# Altium PCB AP2-H.PcbDoc (part 3 of 4)
Units mm, origin at the board's own origin, x right, y up, seen from the top; angles counter-clockwise.
Board outline 380 x 190 mm, 2 copper layers (Top Layer, Bottom Layer); 519 components, 519 nets, 1666 pads, 438 vias.
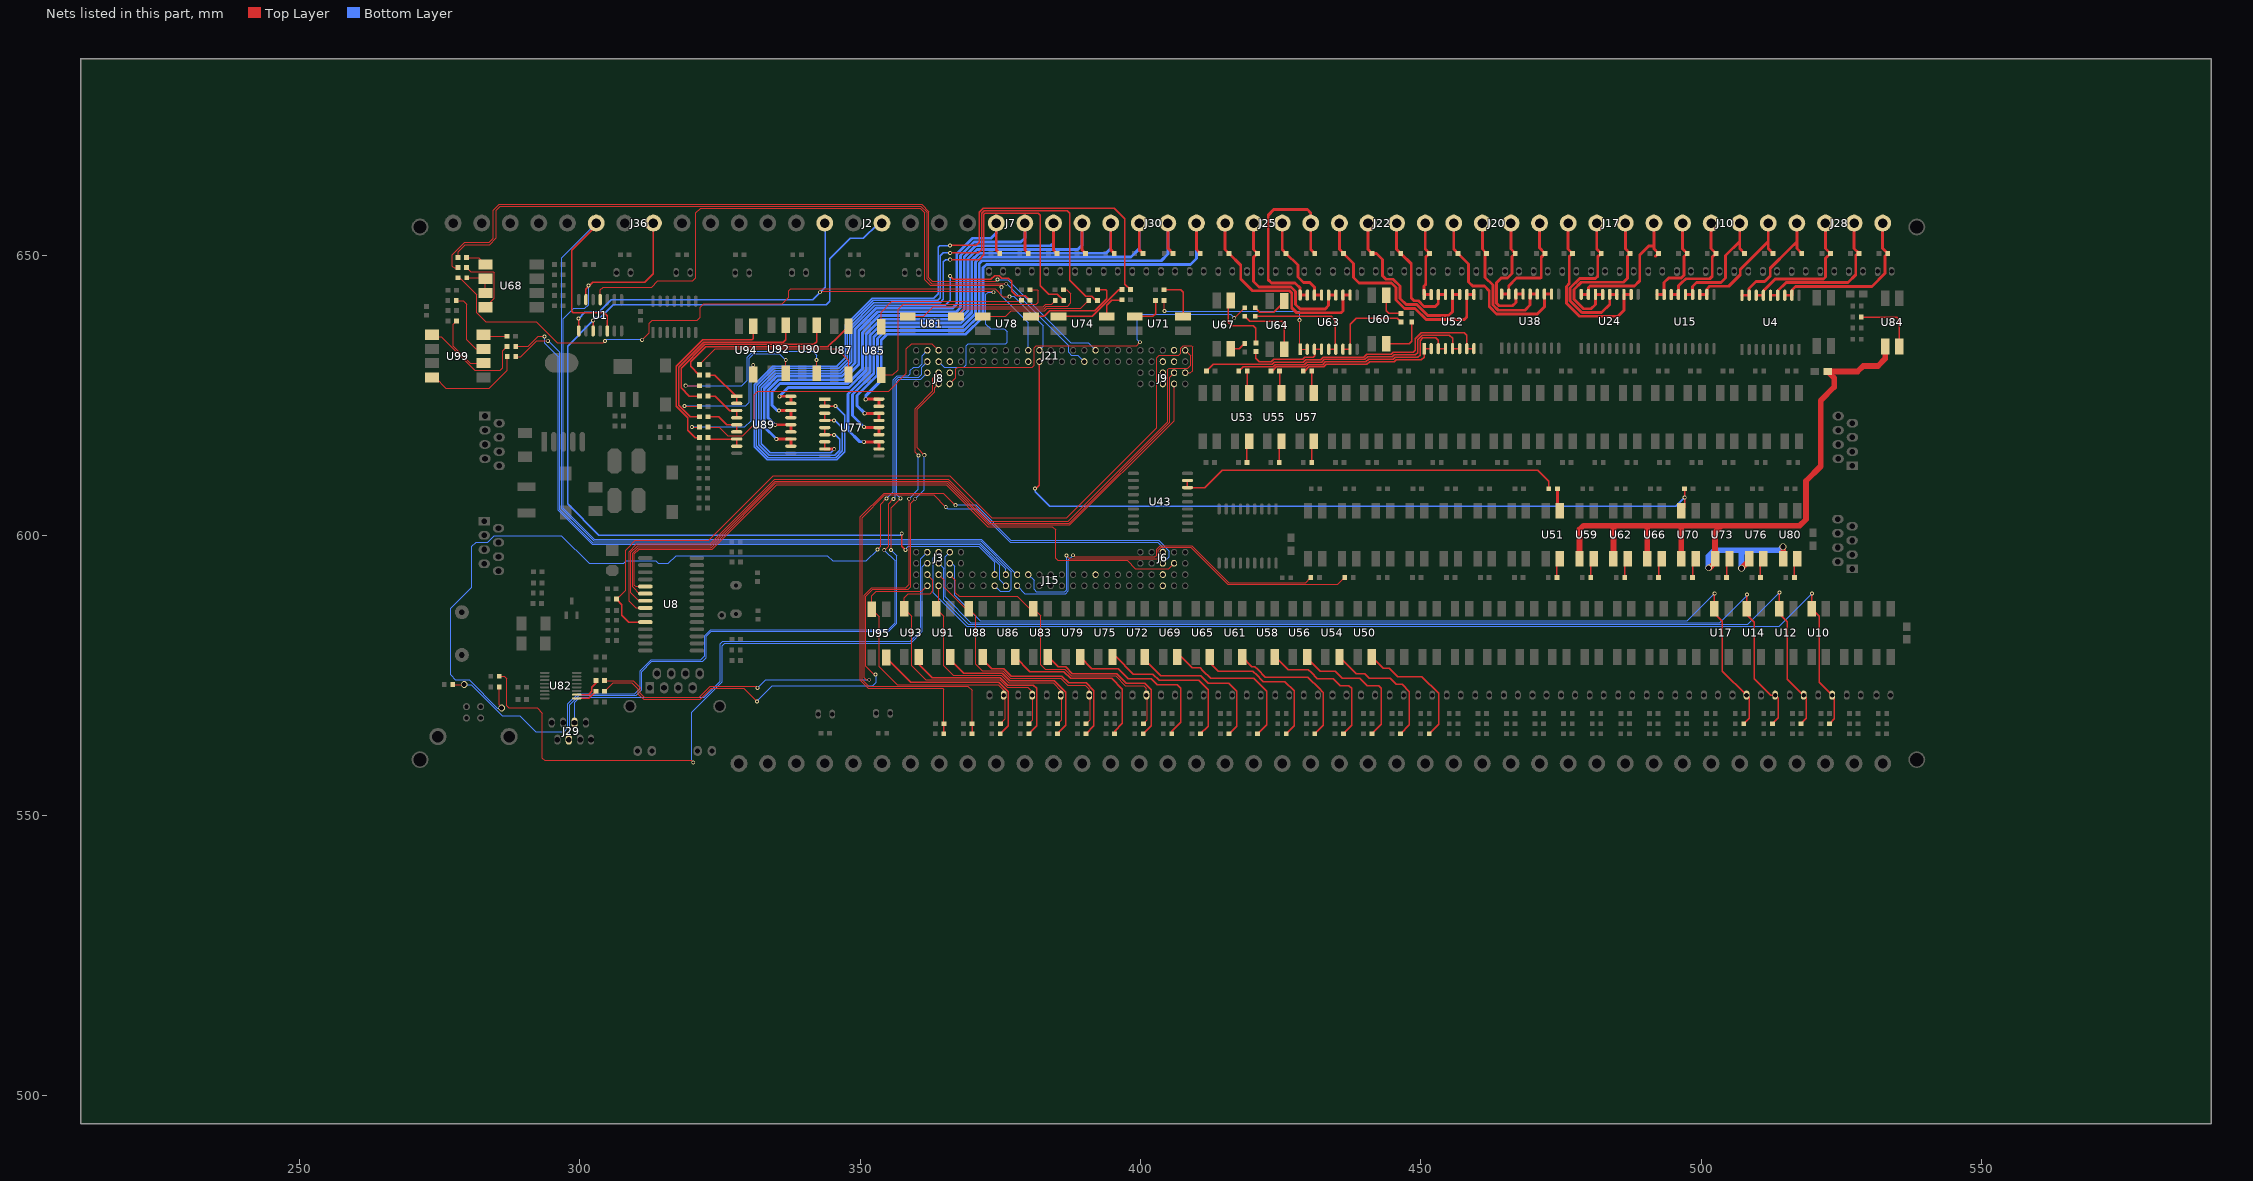
[diagram p3: the nets of this part, all layers, seen from the top]

## Via types
v1: diameter 0.7, hole 0.4, Top Layer to Bottom Layer, 204 vias
v2: diameter 1.2, hole 0.9, Top Layer to Bottom Layer, 160 vias
v3: diameter 1, hole 0.7, Top Layer to Bottom Layer, 38 vias
v4: diameter 0.8, hole 0.5, Top Layer to Bottom Layer, 14 vias
v5: diameter 3.556, hole 3.556, Top Layer to Bottom Layer, 10 vias
v6: diameter 2.3, hole 1.7, Top Layer to Bottom Layer, 8 vias
v7: diameter 1.1, hole 0.8, Top Layer to Bottom Layer, 2 vias
v8: diameter 2.8, hole 2.8, Top Layer to Bottom Layer, 2 vias

## Nets (pads, with @x,y where several pads share a name; then routed paths per layer and width w, separated by ;. In a path a pad name is that pad's centre, name@x,y a point inside that pad or via, vN(x,y) a via of type N, cw(c..) or ccw(c..) an arc to the next point about the centre after c; other vN are vias at no path point) (continued)
NetR127_2: R127.2 U52.7 U52.8 | length 54.3
  Top Layer w0.254: R127.2@411.776,629.3 413.008,630.532 423.532,630.532 423.9,630.9 429.047,630.9 429.479,631.332 432.132,631.332 432.6,631.8 439.857,631.8 440.353,632.295 444.774,632.295 445.106,632.627 448.664,632.627 449.036,633 449.036,635.058 450.11,636.132 457.768,636.132 458.22,635.68 U52.7@458.22,633.3 U52.8@459.49,633.3
NetR128_1: R128.1 U50.2 | length 23
  Top Layer w0.254: U50.2@441.298,578.3 443.279,576.319 444.36,576.319 ; 444.1,576.319 444.36,576.319 ; 450,574.782 450.224,574.782 ; R128.1@451.512,564.6 453.2,566.288 453.2,571.807 450.224,574.782 ; 444.36,576.319 445.897,574.782 450.224,574.782
NetR130_2: R130.2 U51.2 | length 3.5
  Top Layer w0.254: R130.2@474.286,592.5 474.286,595.273 U51.2@474.813,595.8
NetR131_1: R131.1 U51.3 | length 4.1
  Top Layer w0.508: R131.1@474.373,608.3 474.373,604.84 U51.3@474.813,604.4
NetR131_2: R131.2 U43.7 U43.8 | length 69.2
  Top Layer w0.254: U43.8@408.4,609.79 U43.7@408.4,608.52 411.52,608.52 414.62,611.62 470.88,611.62 472.849,609.651 R131.2@472.849,608.3
NetR132_2: R132.2 U53.2 | length 4
  Top Layer w0.254: R132.2@419.003,613 419.003,616.395 U53.2@419.408,616.8
NetR133_1: R133.1 U53.3 | length 3.5
  Top Layer w0.254: U53.3@419.058,625.751 R133.1@419.058,629.3
NetR133_2: R133.2 U52.5 U52.6 | length 45.5
  Top Layer w0.254: R133.2@417.534,629.3 418.334,630.1 423.71,630.1 424.079,630.468 429.226,630.468 429.658,630.9 432.311,630.9 432.779,631.368 440.036,631.368 440.532,631.864 444.953,631.864 445.285,632.196 449.064,632.196 449.468,632.6 449.468,634.879 450.289,635.7 455.1,635.7 455.68,635.12 U52.5@455.68,633.3 U52.6@456.95,633.3
NetR134_1: R134.1 U54.2 | length 23.2
  Top Layer w0.254: U54.2@435.514,578.3 438.495,575.319 440.006,575.319 440.819,574.506 444.523,574.506 445.63,573.4 446.7,573.4 448,572.1 448,566.189 R134.1@446.411,564.6
NetR140_2: R140.2 U55.2 | length 4
  Top Layer w0.254: R140.2@424.782,613 424.782,616.405 U55.2@425.177,616.8
NetR141_1: R141.1 U55.3 | length 3.5
  Top Layer w0.254: U55.3@424.816,625.761 R141.1@424.816,629.3
NetR141_2: R141.2 U52.3 U52.4 | length 36.7
  Top Layer w0.254: R141.2@423.292,629.3 423.521,629.3 424.258,630.037 429.405,630.037 429.837,630.468 432.49,630.468 432.958,630.936 440.215,630.936 440.71,631.432 445.132,631.432 445.464,631.764 449.5,631.764 449.9,632.164 449.9,634.7 450.4,635.2 452.7,635.2 453.14,634.76 U52.3@453.14,633.3 U52.4@454.41,633.3
NetR142_1: R142.1 U56.2 | length 24.2
  Top Layer w0.254: U56.2@429.73,578.3 U56.2@429.824,578.3 ; U56.2@429.824,577.8 430.001,577.8 432.087,575.714 434.771,575.714 435.271,575.214 435.979,574.506 439.169,574.506 439.669,574.006 440.482,573.194 442.5,573.194 443,572.694 443,566.29 R142.1@441.31,564.6
NetR144_1: R144.1 U59.1 U62.1 U66.1 U70.1 U73.1 U76.1 U80.1 U84.1 | length 139.2
  Top Layer w0.254: 502.166,599 502.5,598.666 ; U73.1@502.5,596.468 502.5,595.84 U73.1@502.54,595.8
  Top Layer w1.016: U59.1@478.327,595.8 478.327,601.034 479.026,601.734 503.69,601.734 ; U62.1@484.38,595.8 484.38,601.732 ; U66.1@490.433,595.8 490.433,601.515 ; U70.1@496.487,595.8 496.487,601.676 ; v2@501.472,594.106 502.5,595.134 U73.1@502.5,595.84 ; U73.1@502.5,596.468 502.5,598.666 502.5,600.544 503.69,601.734 ; v2(507.213,594.131) 508.593,595.512 U76.1@508.593,595.8 ; v2(514.604,597.967) 514.647,597.924 U80.1@514.647,595.8 ; U84.1@532.841,633.684 532.841,631.495 531.553,630.207 528.931,630.207 527.932,629.209 R144.1@522.605,629.209 523.748,628.066 523.748,626.44 521.353,624.045 521.353,612.31 518.732,609.689 518.732,602.85 517.615,601.734 503.69,601.734
  Bottom Layer w1.016: v2@501.345,594.208 501.345,596.29 502.412,597.357 507.898,597.357 ; v2(507.213,594.131) 507.213,596.671 507.898,597.357 ; v2(514.604,597.967) 513.994,597.357 507.898,597.357
  other v2: 501.371,594.208
NetR145_2: R145.2 U57.2 | length 4
  Top Layer w0.254: R145.2@430.561,613 430.561,616.416 U57.2@430.945,616.8
NetR146_1: R146.1 U57.3 | length 3.5
  Top Layer w0.254: U57.3@430.574,625.772 R146.1@430.574,629.3
NetR146_2: R146.2 U52.1 U52.2 | length 25.4
  Top Layer w0.254: R146.2@429.05,629.3 429.279,629.3 430.016,630.037 432.669,630.037 433.137,630.505 440.394,630.505 440.889,631 445.311,631 445.643,631.332 448.942,631.332 450.132,631.332 450.6,631.8 U52.1@450.6,633.3 U52.2@451.87,633.3
NetR147_1: R147.1 U58.2 | length 24.6
  Top Layer w0.254: U58.2@423.946,578.3 U58.2@424.609,578.3 ; U58.2@424.609,577.8 426.371,576.038 429.936,576.038 430.436,575.538 431.573,574.401 434.399,574.401 434.4,574.4 434.436,574.4 435.642,573.194 437.206,573.194 437.7,572.7 437.7,566.091 R147.1@436.209,564.6
NetR148_1: R148.1 U59.2 | length 2.8
  Top Layer w0.254: R148.1@480.338,592.5 U59.2@480.338,595.271
NetR157_2: R157.2 U60.2 | length 8.2
  Top Layer w0.254: U60.2@443.84,634.2 448,634.2 448.4,634.6 R157.2@448.4,638.076
NetR158_1: R158.1 U60.3 | length 5.6
  Top Layer w0.254: U60.3@443.84,642.8 443.84,640.06 444.3,639.6 R158.1@446.5,639.6
NetR158_2: R158.2 U63.7 U63.8 | length 15.6
  Top Layer w0.254: U63.7@436.12,633.2 U63.8@437.39,633.2 437.39,637.69 438.459,638.759 445.817,638.759 R158.2@446.5,638.076
NetR159_1: R159.1 U61.2 | length 25.1
  Top Layer w0.254: U61.2@418.163,578.3 419.867,576.595 420.405,576.595 420.905,576.095 422.274,574.726 429.874,574.726 431.995,572.605 432.001,572.605 432.477,572.129 432.477,572.123 432.6,572 432.6,566.092 R159.1@431.108,564.6
NetR160_1: R160.1 U62.2 | length 3.5
  Top Layer w0.254: R160.1@486.39,592.5 486.39,595.27 U62.2@486.92,595.8
NetR163_2: R163.2 U64.2 | length 12
  Top Layer w0.254: R163.2@418.6,639.076 419.476,638.2 425.3,638.2 425.64,637.86 U64.2@425.64,633.4
NetR164_1: R164.1 U64.3 | length 6.6
  Top Layer w0.254: R164.1@420.5,640.6 421.3,639.8 423.8,639.8 425.64,641.64 U64.3@425.64,642
NetR164_2: R164.2 U63.5 U63.6 | length 21
  Top Layer w0.254: R164.2@420.5,639.076 434.024,639.076 434.8,638.3 434.8,633.25 U63.6@434.85,633.2 U63.5@433.58,633.2
NetR165_1: R165.1 U65.2 | length 25.8
  Top Layer w0.254: U65.2@412.379,577.3 413.896,575.782 420.054,575.782 420.828,575.009 ; 420.554,575.282 421.924,573.913 425.787,573.913 427.406,572.294 427.406,565.999 R165.1@426.008,564.6
NetR166_1: R166.1 U66.2 | length 3.5
  Top Layer w0.254: R166.1@492.441,592.5 492.441,595.268 U66.2@492.973,595.8
NetR171_2: R171.2 U67.2 | length 2.8
  Top Layer w0.254: U67.2@416.14,633.3 417.676,633.3 R171.2@418.6,634.224
NetR172_1: R172.1 U67.3 | length 12.1
  Top Layer w0.254: U67.3@416.14,641.9 415.646,641.406 415.646,638.048 416.294,637.4 420.1,637.4 420.6,636.9 R172.1@420.6,634.3
NetR172_2: R172.2 U63.3 U63.4 | length 14.8
  Top Layer w0.254: R172.2@420.6,632.776 420.6,631.564 421.2,630.964 423.353,630.964 423.789,631.4 428.936,631.4 429.3,631.764 430.8,631.764 431.1,632.064 431.1,633.14 U63.3@431.04,633.2 U63.4@432.31,633.2
NetR177_1: R177.1 U69.2 | length 26.7
  Top Layer w0.254: U69.2@406.595,578.3 407.258,578.3 409.213,576.345 410.655,576.345 411.155,575.845 412.53,574.47 420.218,574.47 422.506,572.181 422.506,566.199 R177.1@420.907,564.6
NetR178_1: R178.1 U70.2 | length 3.5
  Top Layer w0.254: R178.1@498.493,592.5 498.493,595.266 U70.2@499.027,595.8
NetR179_2: R179.2 U68.1 | length 3.9
  Top Layer w0.16: R179.2@279.806,649.554 281.94,649.554 U68.1@283.185,648.31
NetR183_2: R183.2 U68.2 U68.3 | length 6
  Top Layer w0.16: R183.2@279.832,645.947 283.007,645.947 U68.2@283.185,645.77 U68.3@283.185,643.23
  Top Layer w0.203: U68.3@282.542,643.21 U68.3@282.562,643.23
NetR185_2: R185.2 U68.4 | length 12.9
  Top Layer w0.16: R185.2@279.806,647.751 280.543,647.014 284.556,647.014 284.759,646.811 284.759,642.264 U68.4@283.185,640.69
  Top Layer w0.203: U68.4@282.042,641.21 U68.4@282.562,640.69
NetR186_2: R186.2 U71.2 | length 7.9
  Top Layer w0.254: R186.2@404.224,643.8 407.2,643.8 407.6,643.4 U71.2@407.6,639.04
NetR187_1: R187.1 U71.3 | length 6.3
  Top Layer w0.254: U71.3@399,639.04 402.24,639.04 402.7,639.5 R187.1@402.7,641.9
NetR187_2: R187.2 U63.1 U63.2 | length 33.8
  Top Layer w0.16: v1(404.292,640.004) R187.2@404.292,641.832 ; U63.1@428.396,633.304 v1(428.396,638.378) ; U63.1@428.5,633.2 U63.2@429.77,633.2
  Bottom Layer w0.16: v1(404.292,640.004) 428.219,640.004 428.396,639.826 v1(428.396,638.378)
NetR188_1: R188.1 U72.2 | length 26.9
  Top Layer w0.254: U72.2@400.811,577.8 403.675,574.936 410.788,574.936 412.118,573.606 415.762,573.606 417.187,572.181 417.187,565.981 R188.1@415.806,564.6
NetR189_1: R189.1 U73.2 | length 3.5
  Top Layer w0.254: R189.1@504.545,592.5 504.545,595.265 U73.2@505.08,595.8
NetR192_2: R192.2 U74.2 | length 5.2
  Top Layer w0.254: U74.2@394,639.04 394,641.036 394.864,641.9 396.722,641.9 R192.2@396.722,641.762
NetR193_1: R193.1 U74.3 | length 13.3
  Top Layer w0.254: U74.3@385.4,639.04 391.419,639.04 396.179,643.8 R193.1@396.725,643.8
NetR193_2: R193.2 U77.1 U77.2 | length 145.3
  Top Layer w0.254: U77.1@343.7,624.3 U77.2@343.7,623.03 v1@345.618,623.03 ; v1@365.989,651.764 370.764,651.764 371.264,652.264 371.264,657.601 371.98,658.317 395.351,658.317 397.231,656.438 397.231,644.818 R193.2@398.249,643.8
  Bottom Layer w0.254: v1(345.618,623.062) 347.287,621.393 347.287,615.841 347.276,615.831 347.276,614.876 345.863,613.463 333.47,613.463 331.092,615.842 331.092,626.841 334.445,630.194 345.846,630.194 347.312,631.66 347.312,637.498 352.137,642.323 363.118,642.323 363.916,643.12 363.916,651.419 364.185,651.688 v1(366.039,651.688)
NetR194_1: R194.1 U75.2 | length 27.9
  Top Layer w0.254: U75.2@395.027,578.3 395.69,578.3 398.764,575.226 402.236,575.226 403.338,574.123 410.451,574.123 412.09,572.485 412.09,565.985 R194.1@410.705,564.6
NetR195_1: R195.1 U76.2 | length 3.5
  Top Layer w0.254: R195.1@510.597,592.5 510.597,595.263 U76.2@511.133,595.8
NetR198_2: R198.2 U78.2 | length 17.5
  Top Layer w0.254: U78.2@380.9,639.1 382.879,639.1 383.874,640.095 391.888,640.095 394,642.207 394,643.6 393.8,643.8 R198.2@392.324,643.8
NetR199_1: R199.1 U78.3 | length 20.1
  Top Layer w0.203: U78.3@371.9,639.04 375.94,639.04 376.969,640.069 382.969,640.069 383.401,640.501 389.401,640.501 R199.1@390.8,641.9
NetR199_2: R199.2 U77.3 U77.4 | length 135.4
  Top Layer w0.254: U77.3@343.7,621.76 U77.4@343.7,620.49 v1@345.345,620.49 ; v1@366.141,650.367 371.094,650.367 371.678,650.951 371.678,657.429 372.152,657.903 386.944,657.903 387.426,657.421 387.426,645.49 390.298,642.619 391.351,642.619 392.069,641.9 R199.2@392.324,641.9
  Bottom Layer w0.254: v1@345.453,620.56 346.862,619.15 346.862,615.048 345.692,613.877 333.642,613.877 331.506,616.013 331.506,626.669 334.617,629.78 346.204,629.78 347.726,631.302 347.726,637.326 352.309,641.909 363.822,641.909 364.33,642.417 364.33,644.348 364.338,644.356 364.338,649.859 364.846,650.367 v1(366.065,650.367)
  other v1: 345.364,620.471
NetR200_1: R200.1 U79.2 | length 29.2
  Top Layer w0.254: U79.2@389.243,578.3 391.329,576.214 396.035,576.214 396.535,575.714 397.837,574.413 401.899,574.413 403.001,573.311 406.589,573.311 407.2,572.7 407.2,567.699 ; R200.1@405.605,564.6 405.605,565.086 407.2,566.681 407.2,567.699 ; 407.2,567.906 407.2,567.699
NetR201_1: R201.1 U80.2 | length 3.5
  Top Layer w0.254: R201.1@516.648,592.5 516.648,595.262 U80.2@517.187,595.8
NetR210_2: R210.2 U81.2 | length 24.7
  Top Layer w0.203: U81.2@367.1,639.04 368.51,640.45 382.812,640.45 383.243,640.882 387,640.882 387.6,641.482 387.6,643.1 386.9,643.8 R210.2@386.299,643.8
NetR211_1: R211.1 U81.3 | length 27.5
  Top Layer w0.203: U81.3@358.5,639.04 361.316,639.04 363.09,640.814 382.661,640.814 383.093,641.245 384.145,641.245 R211.1@384.8,641.9
NetR211_2: R211.2 U77.5 U77.6 | length 124.8
  Top Layer w0.254: U77.5@343.7,619.22 U77.6@343.7,617.95 v1@345.32,617.95 ; v1(366.065,649.173) 371.221,649.173 372.092,650.044 372.092,657.258 372.323,657.489 381.762,657.489 382.118,657.134 382.118,644.55 383.642,643.026 385.198,643.026 R211.2@386.324,641.9
  Bottom Layer w0.254: v1@345.478,618.02 346.38,617.118 346.38,615.151 345.52,614.291 333.813,614.291 331.92,616.185 331.92,626.498 334.788,629.366 346.376,629.366 348.14,631.131 348.14,637.155 352.48,641.495 364.279,641.495 364.871,642.087 364.871,648.767 365.277,649.173 v1(366.065,649.173)
  other v1: 345.364,617.906
NetR216_1: R216.1 U83.2 | length 29.1
  Top Layer w0.254: U83.2@383.459,578.3 U83.2@384.099,578.3 ; U83.2@384.099,577.8 385.373,576.526 386.673,576.526 387.873,575.326 395.774,575.326 397.5,573.6 400.774,573.6 401.9,572.474 401.9,565.996 R216.1@400.504,564.6
NetR217_1: R217.1 U84.2 | length 11.8
  Top Layer w0.254: R217.1@528.574,638.937 534.873,638.937 535.381,638.429 U84.2@535.381,633.684
NetR218_2: R218.2 U82.10 | length 5.2
  Top Layer w0.254: U82.10@299.45,571.575 301.575,571.575 302.163,572.163 302.163,572.937 302.9,573.673 R218.2@302.9,574.1
NetR219_2: R219.2 U82.9 | length 4
  Top Layer w0.254: U82.9@299.45,570.925 301.625,570.925 R219.2@302.9,572.2
NetR222_2: R222.2 U85.2 | length 43.3
  Top Layer w0.203: U85.2@353.74,628.6 355.753,628.6 355.849,628.6 356.807,629.557 356.807,640.347 357.683,641.223 381.432,641.223 381.8,641.591 381.8,643.6 381.6,643.8 R222.2@380.324,643.8
NetR223_1: R223.1 U85.3 | length 28.6
  Top Layer w0.203: U85.3@353.74,637.2 353.74,639.769 355.683,641.712 378.8,641.712 R223.1@378.8,641.9
NetR223_2: R223.2 U77.7 U77.8 | length 92.6
  Top Layer w0.254: U77.8@343.7,615.41 U77.7@343.7,616.68 ; v1(366.065,646.252) 366.638,645.679 373.341,645.679 373.99,646.328 374.855,646.328 375.287,645.897 376.403,645.897 377.012,645.287 377.012,643.534 377.825,642.722 379.502,642.722 R223.2@380.324,641.9
  Top Layer w0.508: U77.8@343.7,615.41 v1@345.345,615.41
  Bottom Layer w0.254: v1(345.389,615.366) 344.729,614.705 333.985,614.705 332.334,616.356 332.334,626.326 334.96,628.952 346.547,628.952 348.554,630.959 348.554,636.983 352.652,641.081 365.186,641.081 366.065,641.96 v1(366.065,646.252)
NetR224_1: R224.1 U86.2 | length 30
  Top Layer w0.254: U86.2@377.675,578.3 380.263,575.713 386.337,575.713 387.537,574.513 394.855,574.513 396.8,572.568 396.8,566.481 395.403,565.084 R224.1@395.403,564.6
NetR226_2: R226.2 U87.2 | length 31
  Top Layer w0.203: R226.2@321.361,630.479 324.129,633.247 345.821,633.247 347.94,631.128 U87.2@347.94,628.7
NetR227_1: R227.1 U87.3 | length 33.8
  Top Layer w0.254: R227.1@321.34,628.59 319.761,630.169 319.761,630.932 322.464,633.636 344.276,633.636 346.253,635.613 346.269,635.613 346.437,635.781 346.437,635.797 U87.3@347.94,637.3
NetR227_2: R227.2 U89.1 U89.2 | length 8
  Top Layer w0.254: R227.2@322.864,628.59 324.087,628.59 327.878,624.8 U89.1@328,624.8 U89.2@328,623.53
NetR228_1: R228.1 U88.2 | length 30.4
  Top Layer w0.254: U88.2@371.892,577.8 373.471,576.221 375.626,576.221 376.947,574.9 386,574.9 387.2,573.7 390.3,573.7 391.703,572.297 391.703,566.001 R228.1@390.302,564.6
NetR230_2: R230.2 U90.2 | length 34.4
  Top Layer w0.203: v1(318.897,626.694) R230.2@321.335,626.694 ; U90.2@342.24,628.9 v1(342.24,631.266) v1@342.24,631.52
  Bottom Layer w0.203: v1(318.897,626.694) 328.905,626.694 329.88,627.67 329.88,631.765 330.913,632.798 341.521,632.798 342.24,632.079 v1(342.24,631.266)
NetR231_1: R231.1 U90.3 | length 36.5
  Top Layer w0.254: R231.1@321.335,624.845 319.552,624.845 318.072,626.326 318.072,629.829 322.293,634.05 341.772,634.05 342.24,634.518 U90.3@342.24,637.5
NetR231_2: R231.2 U89.3 U89.4 | length 7.5
  Top Layer w0.254: R231.2@322.859,624.845 324.175,624.845 326.76,622.26 U89.3@328,622.26 U89.4@328,620.99
NetR232_1: R232.1 U91.2 | length 31
  Top Layer w0.254: U91.2@366.108,577.8 368.482,575.426 375.322,575.426 376.661,574.087 384.648,574.087 386.713,572.022 386.713,566.111 R232.1@385.202,564.6
NetR238_2: R238.2 U92.2 | length 32.2
  Top Layer w0.203: v1@318.785,622.996 R238.2@321.335,622.996 ; U92.2@336.74,628.9 v1(336.74,631.266) v1@336.74,631.508
  Bottom Layer w0.203: v1(318.694,623.087) 329.634,623.087 330.243,623.697 330.243,631.614 331.064,632.435 335.572,632.435 v1(336.74,631.266)
NetR239_1: R239.1 U92.3 | length 35.1
  Top Layer w0.254: R239.1@321.335,621.147 319.681,621.147 317.658,623.17 317.658,630 322.121,634.464 336.293,634.464 336.74,634.911 U92.3@336.74,637.5
NetR239_2: R239.2 U89.5 U89.6 | length 7
  Top Layer w0.254: R239.2@322.859,621.147 324.825,621.147 326.252,619.72 U89.5@328,619.72 U89.6@328,618.45
NetR240_1: R240.1 U93.2 | length 32.8
  Top Layer w0.254: U93.2@360.44,578.3 360.44,577.047 362.874,574.613 375.036,574.613 376.374,573.274 380.913,573.274 381.5,572.687 381.5,572.148 381.51,572.138 381.51,566.009 R240.1@380.101,564.6
NetR244_2: R244.2 U94.2 | length 24.2
  Top Layer w0.203: v1(319.989,619.328) 319.989,619.298 R244.2@321.335,619.298 ; U94.2@330.94,628.7 v1(330.94,630.377)
  Bottom Layer w0.203: v1(319.989,619.328) 329.463,619.328 330.606,620.471 330.606,630.044 v1(330.94,630.377)
NetR245_1: R245.1 U94.3 | length 32.8
  Top Layer w0.254: R245.1@321.335,617.449 320.573,617.449 319.303,618.719 319.303,620.939 317.244,622.999 317.244,630.172 321.95,634.878 330.713,634.878 330.94,635.105 U94.3@330.94,637.3
NetR245_2: R245.2 U89.7 U89.8 | length 6.5
  Top Layer w0.254: R245.2@322.859,617.449 323.128,617.18 U89.7@328,617.18 U89.8@328,615.91
NetR246_1: R246.1 U95.2 | length 32.4
  Top Layer w0.254: U95.2@354.64,578.2 359.04,573.8 374.75,573.8 376.413,572.137 376.413,566.013 R246.1@375,564.6
NetR267_2: R267.2 U99.1 | length 19.5
  Top Layer w0.16: U99.1@273.685,635.787 274.091,635.381 275.336,635.381 281.305,629.412 285.775,629.412 286.233,629.869 286.233,632.892 R267.2@287.045,633.705
NetR268_2: R268.2 U99.4 | length 17.9
  Top Layer w0.16: U99.4@273.685,628.167 274.193,628.167 276.112,626.248 283.854,626.248 287.071,629.465 R268.2@287.071,631.876
NetR269_2: R269.2 U99.6 | length 11.4
  Top Layer w0.16: R269.2@278.028,638.251 277.419,637.642 277.419,633.751 280.462,630.707 U99.6@282.829,630.707
NetR270_2: R270.2 U99.7 | length 12.2
  Top Layer w0.16: R270.2@277.978,641.883 279.222,641.883 279.883,641.223 279.883,634.848 281.483,633.247 U99.7@282.829,633.247
NetR271_1: R271.1 U99.8 | length 4.3
  Top Layer w0.16: U99.8@282.829,635.787 283.108,635.508 R271.1@287.02,635.508
OUTPUT1: J28.4 R28.1 U4.17 U4.18 | length 21
  Top Layer w0.508: U4.18@507.314,642.821 U4.17@508.584,642.821 508.584,644.017 509.829,645.262 511.353,645.262 512.343,646.252 512.343,647.646 515.844,651.146 515.865,651.146 517.1,652.38 ; J28.4@517.1,655.7 517.1,652.38 ; R28.1@517.971,650.3 517.1,651.171 517.1,652.348 517.1,652.38
OUTPUT2: J28.3 R27.1 U4.15 U4.16 | length 24.5
  Top Layer w0.508: U4.16@509.854,642.821 U4.15@511.124,642.821 511.124,643.636 513.24,645.752 521.868,645.752 522.196,646.08 522.196,649.416 R27.1@523.081,650.3 522.2,651.181 ; 522.181,651.2 522.2,651.181 ; J28.3@522.2,655.7 522.2,651.181
OUTPUT3: J28.2 R26.1 U4.13 U4.14 | length 26.2
  Top Layer w0.508: U4.14@512.394,642.821 U4.13@513.664,642.821 ; U4.13@513.664,643.56 515.188,645.084 526.212,645.084 527.6,646.472 527.6,649.908 528.091,650.399 527.3,651.19 J28.2@527.3,655.7
OUTPUT4: J28.1 R25.1 U4.11 U4.12 | length 29.6
  Top Layer w0.508: U4.12@514.934,642.821 U4.11@516.204,642.821 516.204,643.788 516.832,644.416 530.471,644.416 532.8,646.744 532.8,649.8 R25.1@533.3,650.3 532.4,651.2 J28.1@532.4,655.7
OUTPUT5: J10.4 R49.1 U15.17 U15.18 | length 17.4
  Top Layer w0.508: U15.18@492.15,642.948 U15.17@493.42,642.948 493.42,645.084 494.208,645.871 496.443,645.871 496.976,646.405 496.976,649.744 R49.1@497.532,650.3 496.7,651.132 J10.4@496.7,655.7
OUTPUT6: J10.3 R48.1 U15.15 U15.16 | length 19.7
  Top Layer w0.508: U15.16@494.69,642.948 U15.15@495.96,642.948 495.96,644.517 496.646,645.203 496.72,645.203 497.294,645.777 501.556,645.777 502.006,646.227 502.006,649.664 R48.1@502.642,650.3 501.8,651.142 J10.3@501.8,655.7
OUTPUT7: J10.2 R47.1 U15.13 U15.14 | length 22.7
  Top Layer w0.508: U15.14@497.23,642.948 U15.13@498.5,642.948 498.5,644.416 499.194,645.109 503.58,645.109 504.368,645.897 504.368,649.892 506.9,652.424 ; J10.2@506.9,655.7 506.9,652.424 ; R47.1@507.9,650.3 R47.1@507.752,650.3 506.9,651.152 506.9,652.424
OUTPUT8: J10.1 R46.1 U15.11 U15.12 | length 23
  Top Layer w0.508: U15.12@499.77,642.948 U15.11@501.04,642.948 501.04,643.959 501.523,644.441 504.944,644.441 506.984,646.481 506.984,647.396 511.86,652.272 512,652.272 ; J10.1@512,655.7 512,652.272 ; R46.1@512.861,650.3 512,651.161 512,652.272
OUTPUT9: J17.4 R78.1 U24.11 U24.12 | length 30.8
  Top Layer w0.508: J17.4@476.3,655.7 476.3,651.094 R78.1@477.094,650.3 ; R78.1@477.1,650.3 R78.1@477.094,650.3 ; U24.11@487.528,642.974 U24.12@486.258,642.974 486.258,640.156 485.183,639.082 478.315,639.082 475.988,641.408 475.988,644.395 476.504,644.911 476.504,649.71 R78.1@477.094,650.3
OUTPUT10: J17.3 R77.1 U24.13 U24.14 | length 29.7
  Top Layer w0.508: J17.3@481.4,655.7 481.4,651.103 R77.1@482.203,650.3 481.584,649.681 481.584,646.201 481.203,645.82 478.358,645.82 476.656,644.119 476.656,641.833 478.739,639.75 482.27,639.75 483.718,641.198 U24.14@483.718,642.974 U24.13@484.988,642.974
OUTPUT11: J17.2 R76.1 U24.15 U24.16 | length 30.6
  Top Layer w0.508: U24.15@482.448,642.974 U24.16@481.178,642.974 481.178,641.198 480.398,640.418 479.016,640.418 477.324,642.109 477.324,643.842 478.635,645.152 486.156,645.152 486.867,645.864 486.867,649.854 R76.1@487.313,650.3 ; J17.2@486.5,655.7 486.5,651.113 R76.1@487.313,650.3 ; R76.1@487.5,650.3 R76.1@487.313,650.3
OUTPUT12: J17.1 R75.1 U24.17 U24.18 | length 26.4
  Top Layer w0.508: U24.18@478.638,642.974 U24.17@479.908,642.974 479.908,644.205 480.187,644.484 488.147,644.484 489.077,645.414 489.077,650.011 490.677,651.612 491.6,651.612 ; J17.1@491.6,655.7 491.6,651.612 ; 491.9,649.777 R75.1@492.423,650.3 491.6,651.123 491.6,651.612
OUTPUT13: J20.4 R107.1 U38.11 U38.12 | length 33.2
  Top Layer w0.508: J20.4@455.9,655.7 455.9,651.055 R107.1@456.655,650.3 458.545,648.41 458.545,645.187 459.283,644.449 461.366,644.449 462.214,643.6 462.214,640.822 463.548,639.488 470.781,639.488 472.059,640.766 U38.12@472.059,643.024 U38.11@473.329,643.024
OUTPUT14: J20.3 R106.1 U38.13 U38.14 | length 26
  Top Layer w0.508: J20.3@461,655.7 461,651.065 461.497,650.567 461.497,646.019 462.882,644.634 462.882,641.099 463.825,640.156 468.605,640.156 469.519,641.071 U38.14@469.519,643.024 U38.13@470.789,643.024
OUTPUT15: J20.2 R105.1 U38.15 U38.16 | length 23.3
  Top Layer w0.508: J20.2@466.1,655.7 466.1,651.074 R105.1@466.874,650.3 466.3,649.726 466.3,646.728 465.458,645.886 464.352,645.886 463.55,645.084 463.55,641.375 463.982,640.944 466.369,640.944 466.979,641.553 U38.16@466.979,643.024 U38.15@468.249,643.024
OUTPUT16: J20.1 R104.1 U38.17 U38.18 | length 19.6
  Top Layer w0.508: U38.18@464.439,643.024 U38.17@465.709,643.024 465.709,644.5 467.095,645.886 471.386,645.886 471.5,646 471.5,649.6 R104.1@472.2,650.3 471.2,651.3 J20.1@471.2,655.7
OUTPUT17: J22.4 R139.1 U52.11 U52.12 | length 40.8
  Top Layer w0.508: J22.4@435.5,655.7 435.5,651.016 R139.1@436.216,650.3 438,648.516 438,646 439,645 444.8,645 445.6,644.2 445.6,642 447.136,640.464 449.011,640.464 450.974,638.5 457.8,638.5 458.22,638.92 U52.12@458.22,642.95 U52.11@459.49,642.95
OUTPUT18: J22.3 R138.1 U52.13 U52.14 | length 32.3
  Top Layer w0.508: J22.3@440.6,655.7 440.6,651.026 R138.1@441.326,650.3 442.1,650.3 443.2,649.2 443.2,646.3 443.814,645.686 445.084,645.686 446.3,644.47 446.3,642.27 447.42,641.149 449.295,641.149 451.258,639.186 454.986,639.186 455.68,639.88 U52.14@455.68,642.95 U52.13@456.95,642.95
OUTPUT19: J22.2 R137.1 U52.15 U52.16 | length 23
  Top Layer w0.508: J22.2@445.7,655.7 445.7,651.035 R137.1@446.435,650.3 448.3,648.435 448.3,642.335 448.8,641.835 449.579,641.835 450.614,640.8 452.6,640.8 453.14,641.34 U52.16@453.14,642.95 U52.15@454.41,642.95
OUTPUT20: J22.1 R136.1 U52.17 U52.18 | length 14.7
  Top Layer w0.508: J22.1@450.8,655.7 450.8,651.045 R136.1@451.545,650.3 450.9,649.655 450.9,644.8 450.6,644.5 U52.18@450.6,642.95 U52.17@451.87,642.95
OUTPUT21: J25.4 R176.1 U63.11 U63.12 | length 37.6
  Top Layer w0.508: J25.4@415.1,655.7 415.1,650.977 R176.1@415.777,650.3 417.9,648.177 417.9,645.75 420.019,643.632 426.569,643.632 427,643.201 427,640.6 427.9,639.7 435.8,639.7 436.12,640.02 U63.12@436.12,642.85 U63.11@437.39,642.85
OUTPUT22: J25.3 R175.1 U63.13 U63.14 | length 31.1
  Top Layer w0.508: J25.3@420.2,655.7 420.2,650.987 R175.1@420.887,650.3 420.2,649.613 420.2,645.3 421.182,644.318 426.853,644.318 427.686,643.485 427.686,641.2 428.5,640.386 432.986,640.386 433.58,640.98 U63.14@433.58,642.85 U63.13@434.85,642.85
OUTPUT23: J25.2 R174.1 U63.15 U63.16 | length 17.1
  Top Layer w0.508: J25.2@425.3,655.7 425.3,650.997 R174.1@425.997,650.3 428.1,648.197 428.1,646.1 429.1,645.1 430.2,645.1 431.04,644.26 U63.16@431.04,642.85 U63.15@432.31,642.85
OUTPUT24: J25.1 R173.1 U63.17 U63.18 | length 36.1
  Top Layer w0.508: U63.17@429.77,642.85 U63.18@428.5,642.85 428.5,644.1 427.597,645.003 423.397,645.003 422.8,645.6 422.8,657.1 423.8,658.1 429.8,658.1 430.4,657.5 J25.1@430.4,655.7 430.4,651.006 R173.1@431.106,650.3
OUTPUT25: J30.1 R212.1 U77.17 U77.18 | length 94.7
  Top Layer w0.508: v1(351.003,624.256) 351.047,624.3 U77.18@353.35,624.3 U77.17@353.35,623.03 ; J30.1@410,655.7 410,650.968 R212.1@410.668,650.3
  Bottom Layer w0.508: v1(351.003,624.256) 351.003,624.891 353.771,627.659 353.771,634.822 354.813,635.864 368.833,635.864 371.932,638.962 371.932,647.725 372.521,648.314 408.919,648.314 410,649.395 J30.1@410,655.7
OUTPUT26: J30.2 R213.1 U77.15 U77.16 | length 94
  Top Layer w0.508: v1(350.825,621.767) 350.831,621.76 U77.16@353.35,621.76 U77.15@353.35,620.49 ; J30.2@404.9,655.7 404.9,651.2 R213.1@405.8,650.3
  Bottom Layer w0.508: v1(350.825,621.767) 349.479,623.113 349.479,624.967 353.103,628.592 353.103,635.099 354.536,636.532 368.557,636.532 371.264,639.239 371.264,648.51 371.736,648.982 403.72,648.982 404.9,650.162 J30.2@404.9,655.7
OUTPUT27: J30.3 R214.1 U77.13 U77.14 | length 91.8
  Top Layer w0.508: v1@350.831,619.22 U77.14@353.35,619.22 U77.13@353.35,617.95 ; J30.3@399.8,655.7 399.8,650.948 R214.1@400.448,650.3
  Bottom Layer w0.508: v1(350.698,619.354) 348.666,621.386 348.666,625.119 352.435,628.889 352.435,635.376 354.259,637.2 368.28,637.2 370.596,639.516 370.596,648.787 371.46,649.65 398.343,649.65 399.8,651.108 J30.3@399.8,655.7
OUTPUT28: J30.4 R215.1 U77.11 U77.12 | length 91.1
  Top Layer w0.508: v1@350.679,616.68 U77.12@353.35,616.68 U77.11@353.35,615.41 ; J30.4@394.7,655.7 394.7,650.939 R215.1@395.339,650.3
  Bottom Layer w0.508: v1(350.672,616.687) 349.936,616.687 347.828,618.795 347.828,625.226 351.767,629.165 351.767,635.652 353.983,637.868 368.003,637.868 369.928,639.792 369.928,649.063 371.183,650.318 393.854,650.318 394.7,651.164 J30.4@394.7,655.7
OUTPUT29: J7.1 R234.1 U89.17 U89.18 | length 87.3
  Top Layer w0.508: v1(335.621,624.8) U89.18@337.65,624.8 U89.17@337.65,623.53 ; J7.1@389.6,655.7 389.6,650.929 R234.1@390.229,650.3
  Bottom Layer w0.508: v1(335.621,624.8) 337.185,626.364 348.021,626.364 351.099,629.442 351.099,635.929 353.706,638.536 367.727,638.536 369.26,640.069 369.26,649.371 370.875,650.986 388.833,650.986 389.6,651.753 J7.1@389.6,655.7
OUTPUT30: J7.2 R235.1 U89.15 U89.16 | length 87.1
  Top Layer w0.508: v1(335.523,622.26) U89.16@337.65,622.26 U89.15@337.65,620.99 ; J7.2@384.5,655.7 384.5,650.919 R235.1@385.119,650.3
  Bottom Layer w0.508: v1(335.523,622.26) 335.218,622.26 334.264,623.214 334.264,625.602 335.737,627.075 347.788,627.075 350.431,629.719 350.431,636.206 353.429,639.204 367.45,639.204 368.592,640.346 368.592,649.648 370.598,651.654 384.023,651.654 384.5,652.131 J7.2@384.5,655.7
OUTPUT31: J7.3 R236.1 U89.13 U89.14 | length 85.1
  Top Layer w0.508: v1(334.874,619.705) 334.859,619.72 U89.14@337.65,619.72 U89.13@337.65,618.45 ; J7.3@379.4,655.7 379.4,650.91 R236.1@380.01,650.3
  Bottom Layer w0.508: v1@334.874,619.684 333.596,620.961 333.596,625.879 335.461,627.743 347.048,627.743 349.763,630.459 349.763,636.482 353.152,639.872 367.173,639.872 367.924,640.623 367.924,649.925 370.322,652.322 378.662,652.322 379.4,653.06 J7.3@379.4,655.7
OUTPUT32: J7.4 R237.1 U89.11 U89.12 | length 82.8
  Top Layer w0.508: v1(335.066,617.18) U89.12@337.65,617.18 U89.11@337.65,615.91 ; J7.4@374.3,655.7 374.3,650.9 R237.1@374.9,650.3
  Bottom Layer w0.508: v1(335.066,617.18) 332.918,619.328 332.918,626.145 335.184,628.411 346.771,628.411 349.095,630.735 349.095,636.759 352.876,640.54 366.522,640.54 367.256,641.274 367.256,650.201 370.045,652.99 373.355,652.99 374.3,653.935 J7.4@374.3,655.7
PA2: J6.8 U8.5 | length 118.5
  Top Layer w0.16: U8.5@311.7,590.875 310.012,590.875 309.763,591.124 309.763,596.681 310.587,597.506 323.584,597.506 323.609,597.53 323.642,597.53 335.134,609.022 365.338,609.022 372.802,601.558 384.317,601.558 384.886,600.989 384.886,595.884 385.25,595.52 397.662,595.52 399.126,594.055 405.055,594.055 J6.8@406,595
PA3: J9.9 R35.2 U8.10 | length 154.6
  Top Layer w0.16: R35.2@306.553,588.62 308.163,590.23 308.163,597.344 308.712,597.893 308.712,597.916 309.901,599.106 322.921,599.106 322.946,599.13 322.979,599.13 334.471,610.622 366,610.622 373.464,603.158 386.87,603.158 394.949,611.237 ; 395.769,612.057 394.949,611.237 ; J9.9@408,629 408.934,629 409.296,629.361 409.296,633.603 409.059,633.84 407.673,633.84 407.21,633.377 407.21,632.508 406.862,632.16 406.195,632.16 403.361,632.16 402.88,631.678 402.88,619.168 394.949,611.237
  Top Layer w0.254: R35.2@306.553,588.62 307.533,587.639 307.533,585.734 308.742,584.525 U8.10@311.7,584.525
PA5: J21.49 U8.8 | length 141.1
  Top Layer w0.16: 308.802,588.25 309.987,587.065 U8.8@311.7,587.065 ; 308.803,588.25 308.803,597.079 310.19,598.466 323.186,598.466 323.211,598.49 323.244,598.49 334.737,609.982 365.735,609.982 373.199,602.518 387.135,602.518 404.886,620.269 404.886,621.792 ; 404.886,621.563 404.886,621.792 ; J21.49@408,633 408.965,632.035 408.965,630.352 408.457,629.844 405.105,629.844 404.886,629.625 404.886,621.792
PA6: J9.8 U8.6 | length 127.8
  Top Layer w0.16: U8.6@311.7,589.605 310.647,589.605 309.443,590.809 309.443,596.814 310.455,597.826 323.451,597.826 323.476,597.85 323.509,597.85 335.002,609.342 365.47,609.342 372.934,601.878 387.4,601.878 406,620.478 J9.8@406,627
PA7: J9.7 U8.7 | length 131.7
  Top Layer w0.16: U8.7@311.7,588.335 310.546,588.335 309.123,589.758 309.123,596.946 310.322,598.146 323.319,598.146 323.343,598.17 323.377,598.17 334.869,609.662 365.603,609.662 373.067,602.198 387.268,602.198 405.206,620.137 405.206,621.208 ; 405.206,620.878 405.206,621.208 ; J9.7@406,629 405.206,628.206 405.206,621.208
PA8: J2.1 J21.6 U1.1 | length 120
  Top Layer w0.16: v1@343.052,643.534 373.609,643.534 v1(373.786,643.357)
  Top Layer w0.254: U1.1@299.833,636.457 v1@299.833,638.62
  Bottom Layer w0.16: J21.6@364,631 365.029,629.971 368.452,629.971 368.91,630.428 368.91,633.806 369.265,634.162 375.971,634.162 376.25,634.441 376.25,636.346 375.742,636.854 373.278,636.854 372.44,637.692 372.44,642.976 372.821,643.357 v1(373.786,643.357)
  Bottom Layer w0.254: v1(299.796,638.658) 300.888,639.75 303.425,639.75 305.657,641.982 341.526,641.982 343.764,644.22 343.764,654.773 J2.1@344.195,655.205
  other v1: 342.849,643.357
PA9: J8.5 R218.1 | length 115.9
  Top Layer w0.16: R218.1@304.424,574.1 309.54,574.1 310.784,572.855 310.784,571.813 311.504,571.094 321.34,571.094 323.286,573.039 331.455,573.039 v1(331.694,572.8) v1@331.851,572.643 ; v1(351.638,574.243) 351.079,574.243 350.708,574.614 350.708,589.286 352.084,590.662 358.165,590.662 358.75,591.246 v1(358.75,606.527) ; v1(360.401,614.248) 359.843,614.806 359.843,622.606 362.991,625.754 362.991,627.991 J8.5@364,629
  Bottom Layer w0.16: v1@331.851,572.643 331.851,572.897 333.197,574.243 v1(351.638,574.243) v1@351.638,574.167 ; v1(358.75,606.527) 360.401,608.178 v1(360.401,614.248)
PA10: J8.6 R219.1 | length 118.5
  Top Layer w0.16: R219.1@304.424,572.2 305.934,573.71 309.296,573.71 310.464,572.541 310.464,571.68 311.371,570.774 321.473,570.774 323.418,572.719 329.26,572.719 v1(331.622,570.357) v1@331.495,570.357 ; v1(352.755,575.183) 352.45,575.183 351.028,576.605 351.028,589.153 352.217,590.342 358.572,590.342 359.07,590.839 359.07,605.754 v1(359.842,606.527) ; v1@361.48,614.312 360.163,615.629 360.163,622.473 363.311,625.622 363.311,626.311 J8.6@364,627
  Bottom Layer w0.16: v1(331.622,570.357) 331.622,570.459 334.34,573.176 352.273,573.176 352.908,573.811 352.908,575.031 v1(352.755,575.183) ; v1(359.842,606.527) 361.467,608.152 v1(361.467,614.299)
PA11: J21.3 R251.1 | length 158.4
  Top Layer w0.16: R251.1@285.648,572.973 285.648,569.798 286.258,569.189 v2(286.08,569.189) ; v1(353.111,597.459) 353.695,598.043 353.695,605.561 v1(354.711,606.577)
  Bottom Layer w0.16: v2(286.08,569.189) 285.295,569.189 280.264,574.22 277.823,574.22 276.948,575.095 276.948,586.955 280.732,590.739 280.732,598.029 281.508,598.805 283.566,598.805 284.709,599.948 296.697,599.948 301.652,594.993 307.831,594.993 308.304,595.466 313.524,595.466 313.997,594.993 315.822,594.993 317.23,596.401 344.148,596.401 345.097,595.452 351.104,595.452 v1(353.111,597.459) ; v1@354.901,606.768 355.925,607.792 355.925,627.772 356.633,628.48 358.572,628.48 358.953,628.861 358.953,629.437 359.537,630.022 360.477,630.022 361.061,630.606 361.061,632.061 J21.3@362,633
PA12: J21.4 R250.2 | length 149.6
  Top Layer w0.16: R250.2@277.343,573.38 v2(279.375,573.38) ; v1@354.482,597.459 355.092,598.068 355.092,605.638 v1(355.956,606.501)
  Bottom Layer w0.16: v2(279.375,573.38) 280.652,573.38 285.914,568.118 ; 286.087,567.944 285.914,568.118 ; v1@354.317,597.37 356.245,595.442 356.245,584.434 354.987,583.176 323.36,583.176 322.285,582.102 322.285,578.515 321.589,577.819 312.749,577.819 310.754,575.824 310.754,572.734 309.804,571.784 299.76,571.784 297.891,569.916 297.891,565.668 297.221,564.998 292.167,564.998 289.311,567.854 286.178,567.854 285.914,568.118 ; v1(355.956,606.501) 356.245,606.791 356.245,627.64 356.766,628.16 360.426,628.16 360.959,628.693 360.959,629.959 J21.4@362,631
  other v1: 354.305,597.357
PA13: J8.3 J29.4 | length 125.3
  Top Layer w0.16: v1(355.524,597.383) 355.549,597.408 355.549,604.926 v1(357.226,606.603)
  Bottom Layer w0.16: J29.4@298.048,563.552 298.221,563.725 298.221,569.794 299.892,571.464 310.058,571.464 311.074,572.48 311.074,575.691 312.882,577.499 321.924,577.499 322.605,578.18 322.605,581.969 323.492,582.856 355.12,582.856 356.565,584.302 356.565,596.341 v1@355.651,597.256 ; v1(355.524,597.383) v1@355.575,597.332 ; v1(357.226,606.603) 356.565,607.263 356.565,627.507 356.898,627.84 360.84,627.84 J8.3@362,629
PA14: J3.3 J29.5 | length 89
  Bottom Layer w0.16: J29.5@299.064,566.6 299.064,570.184 300.025,571.144 322.199,571.144 325.069,574.015 325.069,580.619 325.547,581.097 358.923,581.097 360.807,582.981 360.807,595.807 J3.3@362,597
PA15: J3.4 R252.1 | length 121.1
  Top Layer w0.16: R252.1@285.648,574.878 286.537,574.878 286.969,574.446 286.969,569.646 287.35,569.265 292.379,569.265 293.345,568.3 293.345,560.248 293.712,559.88 319.925,559.88 v1@320.243,559.562
  Bottom Layer w0.16: v1@320.243,559.562 319.989,559.816 319.989,568.482 325.389,573.882 325.389,580.329 325.837,580.777 359.056,580.777 361.127,582.848 361.127,594.436 361.691,595 J3.4@362,595
  other v1: 320.243,559.486
PB0: J9.6
PB1: J9.5
PB2: J21.46
PB3: J2.3 J15.15 U1.3 | length 184.2
  Top Layer w0.254: U1.3@302.373,636.457 v1@302.373,638.327 ; v1(357.429,600.329) 357.429,598.068 v1(358.089,597.408)
  Bottom Layer w0.16: v1@358.038,597.459 358.613,598.033 371.135,598.033 374,595.168 J15.15@374,593
  Bottom Layer w0.254: v1(302.387,638.327) 297.815,633.755 297.815,605.612 303.403,600.024 357.124,600.024 v1(357.429,600.329) ; v1@302.463,638.599 302.76,638.896 303.742,638.896 306,641.154 344,641.154 344.592,641.746 344.592,649.341 348.234,652.983 350.571,652.983 353.111,655.523 J2.3@353.873,655.523
PB4: J15.16 J36.4 U1.5 | length 172.1
  Top Layer w0.254: J36.4@302.937,655.701 302.937,655.235 298.552,650.85 298.552,640.01 298.837,639.724 304.368,639.724 304.913,639.179 U1.5@304.913,636.457
  Bottom Layer w0.16: J36.4@302.937,655.701 296.772,649.537 296.772,604.704 302.459,599.017 371.508,599.017 376.987,593.538 376.987,590.372 376.606,589.991 375.009,589.991 J15.16@374,591
PB5: J15.17 R268.1 | length 122.9
  Top Layer w0.16: R268.1@288.595,631.876 289.481,631.876 292.301,634.695 v1(294.31,634.695)
  Bottom Layer w0.16: v1@294.348,634.733 296.452,632.629 296.452,604.571 302.326,598.697 371.375,598.697 376,594.073 J15.17@376,593
PB6: J15.18 R267.1 | length 125
  Top Layer w0.16: R267.1@288.569,633.705 290.83,633.705 292.608,635.483 v1(293.726,635.483)
  Bottom Layer w0.16: v1(293.726,635.483) 293.72,635.477 293.72,634.263 296.132,631.85 296.132,604.439 302.194,598.377 371.243,598.377 374.955,594.665 374.955,592.045 J15.18@376,591 J15.18@376.141,591
PB7: J15.19 J36.2 U1.13 | length 152.7
  Top Layer w0.254: U1.13@301.103,642.045 301.103,643.927 302.293,645.117 311.607,645.117 313.137,646.646 J36.2@313.137,655.701
  Bottom Layer w0.16: v1(301.574,644.576) 301.574,641.172 300.933,640.531 298.966,640.531 297.092,638.657 297.092,604.836 302.591,599.337 371.641,599.337 377.978,593 J15.19@378,593
PB8: J15.20 R73.1 | length 63.7
  Top Layer w0.16: v1(387.985,596.443) 388.268,596.16 402.565,596.16 402.89,596.485 402.89,597.51 403.565,598.185 409.119,598.185 415.738,591.566 429.466,591.566 R73.1@430.4,592.5
  Bottom Layer w0.16: J15.20@378,591 379.38,589.62 386.655,589.62 387.172,590.138 387.172,595.63 v1(387.985,596.443)
PB9: J15.21 R83.1 | length 70.2
  Top Layer w0.16: v1(386.817,596.392) 387.369,595.84 403.003,595.84 403.21,596.047 403.21,597.377 403.698,597.865 408.986,597.865 415.605,591.246 435.198,591.246 R83.1@436.452,592.5
  Bottom Layer w0.16: J15.21@380,593 381.025,591.975 381.025,590.372 381.457,589.94 386.522,589.94 386.852,590.271 v1@386.852,596.534
PB10: J21.33 R185.1 | length 142.4
  Top Layer w0.16: R185.1@278.282,647.751 277.571,647.751 277.292,648.03 277.292,650.016 279.528,652.252 283.85,652.252 284.607,653.009 284.607,657.977 285.648,659.018 360.99,659.018 362.26,657.749 362.26,645.912 362.86,645.312 374.218,645.312 v1(374.523,645.617)
  Bottom Layer w0.16: v1@374.523,645.49 374.599,645.566 376.377,645.566 387.604,634.34 390.66,634.34 J21.33@392,633
PB11: J21.32 R179.1 | length 138.2
  Top Layer w0.16: R179.1@278.282,649.554 278.282,650.554 279.594,651.866 283.917,651.866 285.09,653.039 285.09,657.962 285.826,658.698 360.858,658.698 361.94,657.616 361.94,645.78 362.813,644.907 376.046,644.907 v1(376.072,644.881)
  Bottom Layer w0.16: v1@375.971,644.881 v1(376.072,644.881) 376.119,644.881 387.21,633.79 387.21,632.623 387.673,632.16 388.84,632.16 J21.32@390,631
PB12: J21.23 R183.1 | length 125.2
  Top Layer w0.16: R183.1@278.308,645.947 278.587,645.947 281.661,642.874 281.661,639.724 283.261,638.124 292.227,638.124 296.007,634.345 304.195,634.345 v1(304.495,634.644) ; v1(311.125,634.873) 312.369,636.118 312.369,637.87 312.398,637.87 312.912,638.384 320.96,638.384 321.488,638.912 321.488,640.692 322.146,641.35 336.118,641.35 337.247,642.479 337.247,643.585 337.609,643.947 374.095,643.947 375.472,642.569 v1(376.657,642.569)
  Bottom Layer w0.16: v1(304.495,634.644) 304.825,634.975 v1@311.125,634.975 ; v1@376.657,642.671 377.424,642.671 382.712,637.383 382.712,633.712 J21.23@382,633
PB13: J21.24 R182.2 U70.4 | length 145
  Top Layer w0.254: v1@381.457,608.406 381.975,608.924 J21.24@381.975,630.822 ; U70.4@496.487,604.4 497.063,604.976 R182.2@497.063,608.3
  Bottom Layer w0.254: v1(381.203,608.355) 381.203,607.797 383.835,605.165 495.488,605.165 v1(497.078,606.755)
PB14: J21.21 U1.11 | length 112.1
  Top Layer w0.16: U1.11@303.643,642.045 303.643,643.775 304.165,644.296 312.801,644.296 313.944,645.439 320.192,645.439 320.726,645.973 320.726,657.515 321.589,658.378 360.725,658.378 361.556,657.548 361.556,645.58 362.549,644.587 374.893,644.587 v1(375.209,644.271)
  Bottom Layer w0.16: v1@375.209,644.144 375.209,642.696 380,637.905 J21.21@380,633
PB15: J21.22
PC0: J15.46
PC1: J15.45
PC2: J6.6 R262.2 R265.1 | length 116.5
  Top Layer w0.16: R265.1@364.949,566.4 364.949,572.524 364.744,572.729 351.429,572.729 350.048,574.111 350.048,603.286 354.294,607.532 364.856,607.532 v1(367.005,605.384)
  Top Layer w0.254: R262.2@364.93,564.6 364.93,566.38 R265.1@364.949,566.4
  Bottom Layer w0.16: v1@367.005,605.434 370.594,605.434 376.908,599.12 403.24,599.12 405.181,597.179 405.181,596.181 J6.6@404,595
PC3: J6.5 R263.2 R266.1 | length 117.3
  Top Layer w0.16: v1(365.277,605.053) 363.118,607.212 354.427,607.212 350.368,603.153 350.368,574.243 351.561,573.049 369.24,573.049 369.965,572.324 R266.1@369.965,566.378
  Top Layer w0.254: R263.2@369.965,564.6 369.965,566.378 R266.1@369.987,566.4
  Bottom Layer w0.16: v1@365.227,605.104 v1(365.277,605.053) 365.608,604.723 370.852,604.723 376.776,598.8 403.108,598.8 404.097,597.81 404.097,597 J6.5@404,597
PC4: J21.48
PC5: J21.47
PC6: J21.8
PC7: J8.7
PC8: J8.8 R163.1 | length 64.9
  Top Layer w0.16: J8.8@366,627 367.081,628.081 367.081,629.691 367.386,629.996 380.695,629.996 381.051,630.352 381.051,633.501 381.406,633.857 399.339,633.857 v1(399.923,634.441) ; v1(416.738,638.734) 416.738,638.738 R163.1@418.6,640.6
  Bottom Layer w0.16: v1@399.91,634.428 399.456,634.883 399.456,639.013 399.837,639.394 416.077,639.394 v1(416.738,638.734)
PC9: J21.5 R244.1 | length 54.7
  Top Layer w0.203: R244.1@322.859,619.298 324.922,619.298 326.415,617.804 329.108,617.804 331.147,619.844 331.147,625.114 331.722,625.688 355.077,625.688 358.259,628.871 358.259,633.274 359.176,634.19 362.81,634.19 J21.5@364,633
PC10: J15.3 LED63.K R241.2 U93.4 | length 51.1
  Top Layer w0.203: J15.3@362,593 363,592 363,590.1 362.519,589.619 358.619,589.619 357.9,588.9 U93.4@357.9,586.9 359.2,585.6 359.2,576.7 361.694,574.206 374.893,574.206 376.231,572.868 379.913,572.868 380.697,572.084 LED63.K@380.697,571.5 380.835,571.362 380.835,567.111 R241.2@380.124,566.4
PC11: J15.4 LED64.K R247.2 U95.4 | length 54.4
  Top Layer w0.203: J15.4@362,591 361,590 352.9,590 352.1,589.2 U95.4@352.1,586.8 353.4,585.5 353.4,576.6 356.606,573.394 374.606,573.394 375.6,572.4 LED64.K@375.6,571.5 ; R247.2@375.024,566.4 375.894,567.27 375.894,571.206 LED64.K@375.6,571.5 ; LED64.K@375.735,571.365 LED64.K@375.6,571.5
PC12: J3.5 LED3.K R30.2 U10.4 | length 194.5
  Top Layer w0.254: v1(519.786,589.61) 519.732,589.557 U10.4@519.732,586.9 521.1,585.532 521.1,573.806 LED3.K@523.406,571.5 523.8,571.106 523.8,567.276 R30.2@522.924,566.4
  Bottom Layer w0.16: J3.5@364,597 363.042,596.042 363.042,589.763 369.011,583.794 513.969,583.794 v1(519.786,589.61)
PC13: J15.33
PD0: J3.6 LED4.K R36.2 U12.4 | length 186
  Top Layer w0.254: v1(513.994,589.788) 513.948,589.742 U12.4@513.948,586.9 513.948,586.052 515.383,584.617 515.383,574.353 518.235,571.5 LED4.K@518.31,571.5 518.8,571.01 518.8,567.376 R36.2@517.824,566.4
  Bottom Layer w0.16: J3.6@364,595 364.89,594.11 364.89,588.524 369.285,584.129 508.335,584.129 v1(513.994,589.788)
PD1: J15.5 LED53.K R229.2 U88.4 | length 47.6
  Top Layer w0.203: J15.5@364,593 365,592 365,590.722 368.822,586.9 U88.4@369.352,586.9 370.6,585.652 370.6,577.046 371.814,575.832 375.465,575.832 376.804,574.494 385.832,574.494 387.032,573.294 390.132,573.294 390.89,572.535 LED53.K@390.89,571.5 391.035,571.355 391.035,567.111 R229.2@390.324,566.4
PD2: J15.6 LED54.K R233.2 U91.4 | length 44
  Top Layer w0.203: J15.6@364,591 364,587.332 U91.4@363.568,586.9 364.9,585.568 364.9,576.7 366.581,575.019 375.179,575.019 376.517,573.681 384.413,573.681 385.794,572.3 LED54.K@385.794,571.5 385.935,571.358 385.935,567.111 R233.2@385.224,566.4
PD3: J3.7 LED5.K R41.2 U14.4 | length 181.6
  Top Layer w0.254: v1@508.164,589.419 U14.4@508.164,586.9 508.164,585.836 509.5,584.5 509.5,574.4 512.4,571.5 LED5.K@513.213,571.5 513.8,570.913 513.8,567.476 R41.2@512.724,566.4
  Bottom Layer w0.16: J3.7@366,597 365.21,596.21 365.21,589.017 369.778,584.449 503.347,584.449 508.203,589.305 v1(508.203,589.458)
PD4: J3.8 LED6.K R45.2 U17.4 | length 172
  Top Layer w0.254: v1(502.437,589.636) 502.381,589.579 U17.4@502.381,586.9 502.381,586.119 503.815,584.685 503.815,575.801 LED6.K@508.116,571.5 508.586,571.03 508.586,567.362 R45.2@507.624,566.4
  Bottom Layer w0.16: J3.8@366,595 366.377,595 366.89,594.487 366.89,589.298 371.419,584.769 497.571,584.769 v1(502.437,589.636)
PD5: J15.7 LED52.K R220.2 U83.4 | length 56.6
  Top Layer w0.203: J15.7@366,593 367,592 367,589.8 367.7,589.1 378.021,589.1 380.221,586.9 U83.4@380.919,586.9 382.2,585.619 382.2,576.906 382.987,576.119 386.505,576.119 387.705,574.919 395.606,574.919 397.332,573.194 400.606,573.194 401.084,572.716 LED52.K@401.084,571.5 401.235,571.349 401.235,567.111 R220.2@400.524,566.4